# EAGLE board OSO-MISC-21-003 Sensor Watch Motion (EAGLE 9.6.2)
REV: D
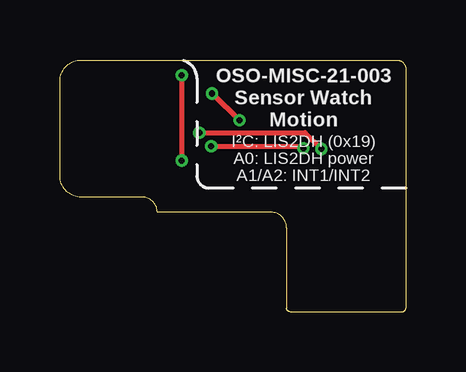
[diagram p0: board, top side]
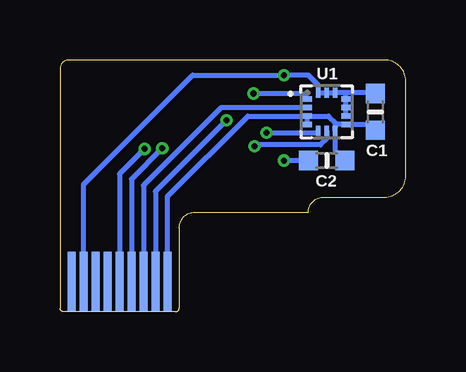
[diagram p1: board, bottom side, seen from below]

Size 14.43 x 10.48 mm. Coordinates in mm from the lower left corner, seen from the top.
Outline: 9.45,3.5 arc90 8.81,4.14 4.06,4.14 arc90 3.43,4.77 0.89,4.77 arc-90 0,5.66 0,9.6 arc-90 0.89,10.48 14.05,10.48 arc-90 14.43,10.1 14.43,3.5
Copper layers (1*16): Top 0.035559375mm / dielectric 4mil / Bottom 0.035559375mm
Design rules "oshpark-2layer *": minimum track width 6mil, minimum drill 10mil, track to track 6mil, track to pad 6mil, pad to pad 6mil, via to via 6mil, smd to smd 6mil, copper to edge 15mil, drill to drill 6mil, minimum pad ring 5mil, minimum via ring 5mil, stop-mask expansion 2.5mil, vias tented up to drill 12mil, thermal gap 10mil
Net classes: 0 default: width 0.203 mm; 1 power: width 0.203 mm; 2 gnd: width 0.203 mm

## Footprints (pad centres in the part's own frame; a part is rotated, then mirrored left to right if it is on the bottom)
_0603MP = smd 0.8 x 0.8: 1 -0.762,0; 2 0.762,0
PQFN35P200X200X100-14N = smd 0.39 x 0.2: 1 -0.795,0.525; 2 -0.795,0.175; 3 -0.795,-0.175; 4 -0.795,-0.525; 8 0.795,-0.525; 9 0.795,-0.175; 10 0.795,0.175; 11 0.795,0.525 | smd 0.2 x 0.39: 5 -0.35,-0.795; 6 0,-0.795; 7 0.35,-0.795; 12 0.35,0.795; 13 0,0.795; 14 -0.35,0.795
FH19C9S05SH10-FFC = smd 0.347 x 2.5 bottom: 1 2,-2.25; 2 1.5,-2.25; 3 1,-2.25; 4 0.5,-2.25; 5 0,-2.25; 6 -0.5,-2.25; 7 -1,-2.25; 8 -1.5,-2.25; 9 -2,-2.25

## Placement (x,y rotation side)
C1  10µF  [_0603MP]  1.27,8.33 90 bottom
C2  0.1uF  [_0603MP]  3.3,6.29 0 bottom
U1  LIS2DHTR  [PQFN35P200X200X100-14N]  3.3,8.33 0 bottom
U$3  FH19C-9S-0.5SH_10-FFC  [FH19C9S05SH10-FFC]  11.94,3.5 0 top

## Library data of the parts
C1 C2 = microbuilder
U1 = LIS2DHTR; DESCRIPTION: Accelerometer X, Y, Z Axis ±2g, 4g, 8g, 16g 0.5Hz ~ 672Hz 14-LGA _2x2_; DIGI-KEY_PART_NUMBER: 497-13795-1-ND; DIGI-KEY_PURCHASE_URL: https://www.digikey.com/product-detail/en/stmicroelectronics/LIS2DHTR/497-13795-1-ND/4209308?utm_source=snapeda&utm_medium=aggregator&utm_campaign=symbol; MF: STMicroelectronics; MP: LIS2DHTR; PACKAGE: LGA-14 STMicroelectronics
U$3 = FH19C-9S-0.5SH

## Nets
3.3V [power]: U$3.1
ACCEL_PWR: C1.1 C2.2 U1.3 U1.4 U1.7 U1.8 U$3.9
GND [gnd]: C1.2 C2.1 U1.9 U1.10 U1.11 U1.12 U1.13 U1.14 U$3.2
INT1: U1.6 U$3.6
INT2: U1.5 U$3.5
SCL: U1.1 U$3.8
SDA: U1.2 U$3.7

## Tracks (layer width: path | path; a pad name or v marks a point on that pad's centre or on a via)
ACCEL_PWR
  Bottom 0.203: U$3.9 9.94,4.8 6.59,8.14 U1.3 | U1.7 2.95,7.81 2.92,7.84 3.23,8.15 U1.3 | C1.1 1.51,7.8 U1.8 2.85,7.8 2.95,7.7 U1.7 | U1.7 2.95,6.71 C2.2 | U1.4 U1.3
GND  (via drill 0.25)
  Top 0.203: v5.08,6.29 v5.08,6.3 v5.08,9.85
  Bottom 0.203: U1.9 U1.10 U1.11 2.51,9.12 | 2.51,9.12 U1.12 U1.13 U1.14 3.65,9.44 4.06,9.85 v5.08,9.85 8.89,9.85 13.44,5.3 U$3.2 | C1.2 1.3,9.12 2.51,9.12 | C2.1 v5.08,6.29
INT1  (via drill 0.25)
  Top 0.203: v6.31,6.89 10.07,6.89 v10.16,6.8
  Bottom 0.203: U1.6 3.3,7.21 3.56,6.95 6.25,6.95 v6.31,6.89 | v10.16,6.8 11.44,5.52 U$3.6
INT2  (via drill 0.25)
  Top 0.203: v5.82,7.46 10.22,7.46 v10.9,6.78
  Bottom 0.203: U1.5 3.75,7.44 5.8,7.44 v5.82,7.46 | v10.9,6.78 11.94,5.74 U$3.5
SCL  (via drill 0.25)
  Top 0.203: v6.35,9.09 6.37,9.09 v7.48,7.97
  Bottom 0.203: v6.35,9.09 4.34,9.09 U1.1 | v7.48,7.97 10.44,5.02 U$3.8
SDA
  Bottom 0.203: U1.2 7.7,8.5 10.94,5.26 U$3.7

## Text on the board
tPlace: OSO-MISC-21-003 / Sensor Watch / Motion | I²C: LIS2DH (0x19) / A0: LIS2DH power / A1/A2: INT1/INT2